# Altium PCB AdaptadorUSBSerialRS232.PcbDoc
Units mil, origin at the board's own origin, x right, y up, seen from the top; angles counter-clockwise.
Board outline 2378.52 x 1000.56 mil, 2 copper layers (Top Layer, Bottom Layer), stack 65.792 mil thick; 27 components, 35 nets, 155 pads, 6 vias.
Unrouted connection lines stored in the file: 28.
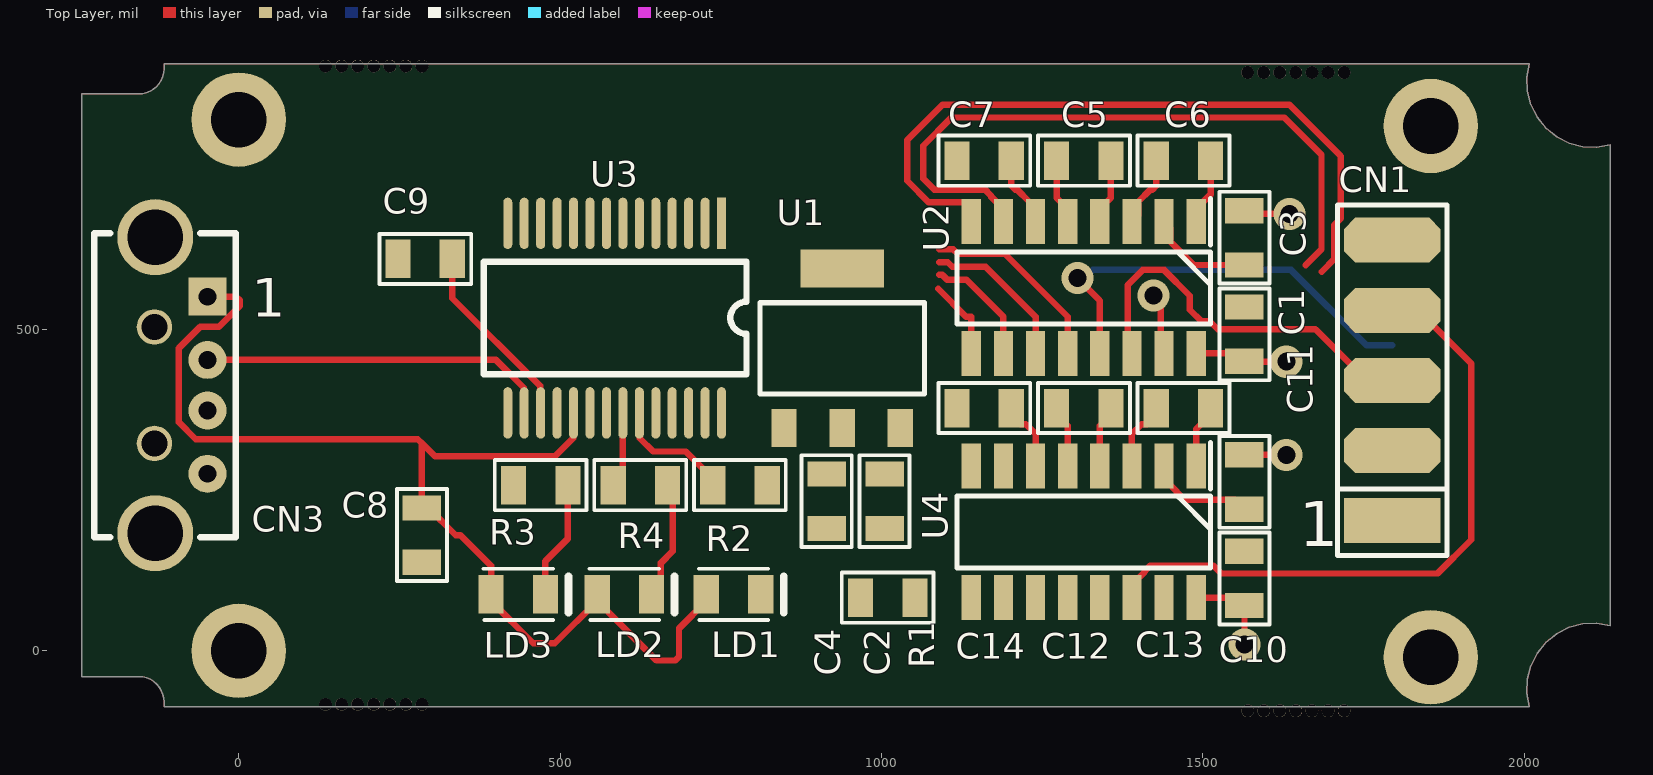
[diagram p0: Top Layer view]
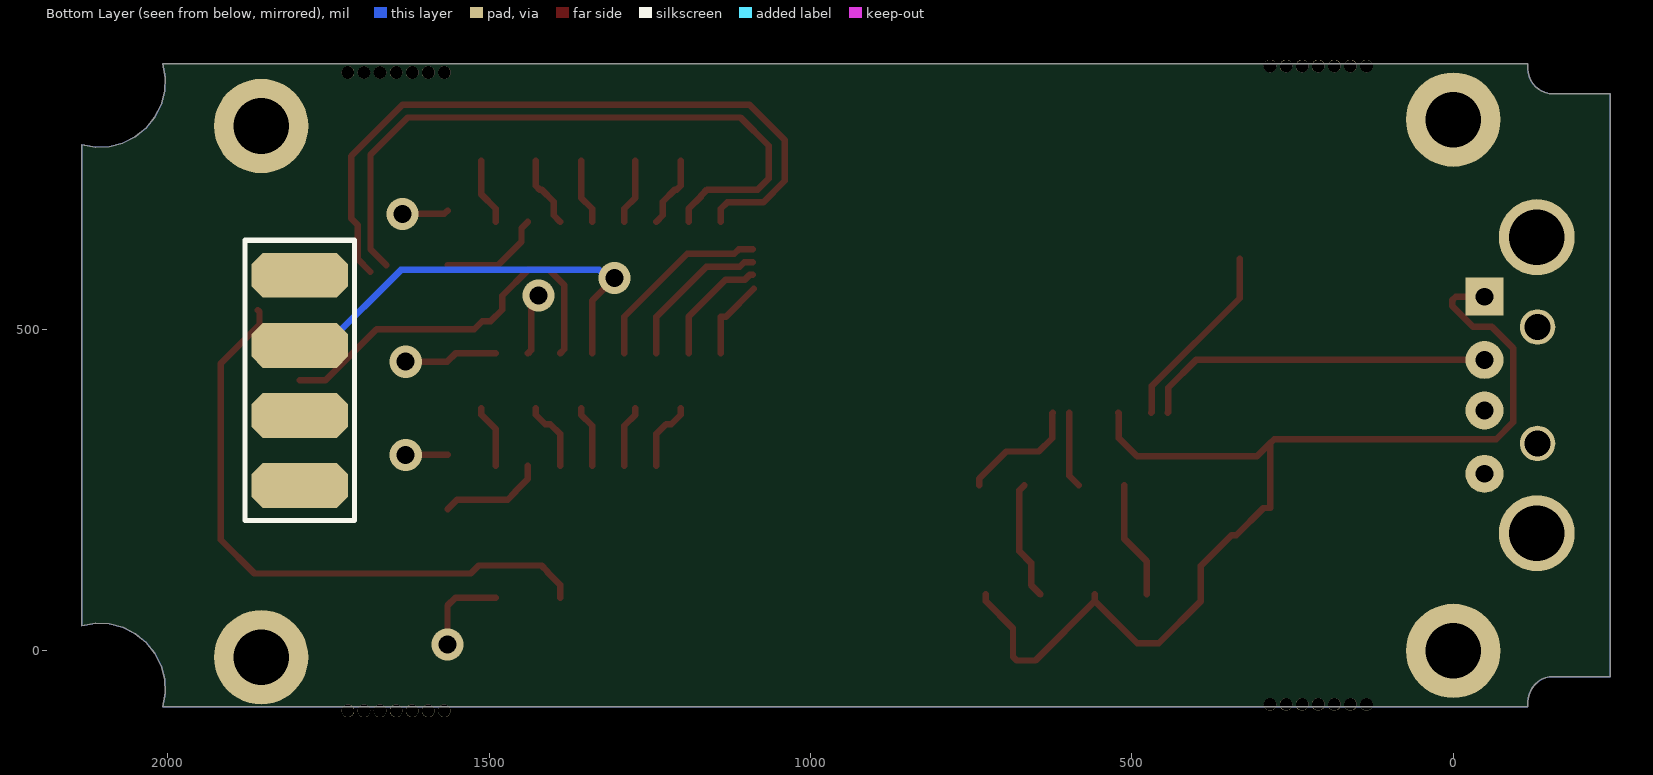
[diagram p1: Bottom Layer view, seen from below]
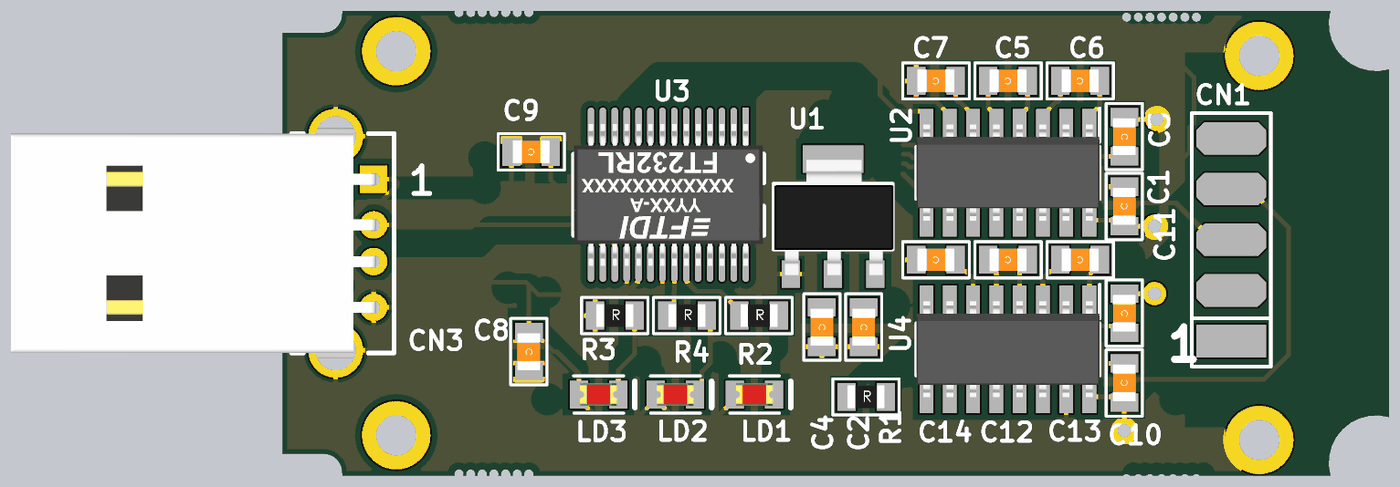
[diagram p2: 3D render of the assembled board from above, using the file's embedded part models]

## Layer stack, top to bottom
Top Solder: solder mask 0.4, Solder Resist, Dk 3.5
Top Layer: signal copper 1.4
Dielectric 1: dielectric 62.9921, FR-4, Dk 4.8
Bottom Layer: signal copper 1.4
Bottom Solder: solder mask 0.4, Solder Resist, Dk 3.5

## Board outline
-116.42,-86.9 -116.42,-79.31 -116.85,-73.5 -118.13,-67.83 -120.43,-62 -123.62,-56.61 -127.63,-51.79 -132.35,-47.67 -137.67,-44.35 -143.44,-41.92 -149.53,-40.43 -155.78,-39.94 -244.38,-39.94 -244.38,866.71 -155.78,866.71 -149.98,867.14 -144.32,868.41 -138.49,870.71 -133.09,873.9 -128.28,877.91 -124.16,882.64 -120.84,887.96 -118.41,893.73 -116.92,899.83 -116.42,906.08 -116.42,913.67 2008.09,913.67 2004.42,892.34 2005.33,870.73 2010.78,849.79 2020.52,830.47 2034.11,813.63 2050.94,800.04 2070.26,790.31 2091.2,784.86 2112.82,783.95 2134.14,787.61 2134.14,39.16 2112.82,42.82 2091.2,41.91 2070.26,36.47 2050.94,26.73 2034.11,13.14 2020.52,-3.7 2010.78,-23.02 2005.33,-43.96 2004.42,-65.57 2008.09,-86.9

## Design rules (kind name [scope] priority, off if disabled: settings)
BoardOutlineClearance [IsPolygon] p1: gap=10 ignorepadtopadclearanceinfootprint=FALSE except(0: Arc-SplitContinuation Track-SplitContinuation SMDPad-SplitContinuation THPad-SplitContinuation Via-SplitContinuation Fill-SplitContinuation Poly-SplitContinuation Region-SplitContinuation Text-SplitContinuation)
Clearance Clearance_Poly [InPolygon] p1: gap=15 ignorepadtopadclearanceinfootprint=FALSE except(0: Arc-Hole Track-Hole SMDPad-Hole THPad-Hole Via-Hole Fill-Hole Poly-Hole Region-Hole Text-Hole)
Clearance [All] p2: gap=10 ignorepadtopadclearanceinfootprint=FALSE except(0: Arc-Hole Track-Hole SMDPad-Hole THPad-Hole Via-Hole Fill-Hole Poly-Hole Region-Hole Text-Hole)
ComponentClearance [All] p1: gap=5 collisioncheckmode=3 verticalgap=0 showdistances=FALSE
DiffPairsRouting [All] p1: maxlimit=10 minlimit=10 mostfreqgap=10 toplayer_minwidth=10 toplayer_maxwidth=10 toplayer_prefwidth=10 bottomlayer_minwidth=10 bottomlayer_maxwidth=10 bottomlayer_prefwidth=10 maxuncoupledlength=500
HoleToHoleClearance [All] p1: gap=5 allowstackedmicrovias=TRUE
PolygonConnect PolygonConnect_Via [IsVia] p1: connectstyle=Direct reliefconductorwidth=10 reliefentries=4 polygonreliefangle="90 Angle" airgapwidth=10
PolygonConnect [All] p2: connectstyle=Relief reliefconductorwidth=10 reliefentries=4 polygonreliefangle="90 Angle" airgapwidth=10
RoomDefinition FABIO [False] p1: confinementstyle=ConfineIn formatcopy=TRUE lockcomponents=FALSE outline -239.88,-202.17 1080,-202.17 1080,1130 -239.88,1130
RoomDefinition MATHEUS [False] p2: confinementstyle=ConfineIn formatcopy=TRUE lockcomponents=FALSE outline 1079.92,-202.17 2399.8,-202.17 2399.8,1130 1079.92,1130
RoutingVias [All] p1: holewidth=28 width=50 viastyle="Through Hole" minholewidth=20 minwidth=40 maxholewidth=28 maxwidth=50
SilkToSilkClearance [All] p1 off: silktosilkclearance=10
SolderMaskExpansion [All] p1: expansion=4 istentingtop=FALSE
Width [All] p1: maxlimit=30 minlimit=10 preferedwidth=10 minimp=50.000000 maximp=50.000000 favimp=50.000000
26 further rules are at their usual default settings.

## Classes and differential pairs
differential pair D: +D_P -D_N

## Components (designator, comment, footprint, x,y, rotation, side; value= is the part's Value field where it differs from the comment)
C1 "100n" 0805C 1564.88,492.83 r90 top
C2 "100n" 0805C 1004.88,232.83 r270 top
C3 "100n" 0805C 1564.88,642.83 r270 top
C4 "10u" 0805C 914.88,232.83 r270 top
C5 "100n" 0805C 1314.88,762.83 r180 top
C6 "100n" 0805C 1469.88,762.83 r180 top
C7 "100n" 0805C 1159.88,762.83 r180 top
C8 "10u" 0805C 285,180 r270 top
C9 "100n" 0805C 290,610 r180 top
C10 "100n" 0805C 1564.88,112.83 r90 top
C11 "100n" 0805C 1564.88,262.83 r270 top
C12 "100n" 0805C 1314.88,377.83 r180 top
C13 "100n" 0805C 1469.88,377.83 r180 top
C14 "100n" 0805C 1159.88,377.83 r180 top
CN1 "DB9M" BARRA1X9 1794.88,420.94 r90 top
CN3 "USB" "USB-B 90" -90,413.39 r270 top
LD1 "RED" 0805L 769.88,87.83 r180 top
LD2 "RED" 0805L 599.88,87.83 r180 top
LD3 "RED" 0805L 434.88,87.83 r180 top
R1 "0" 0805R 1009.88,82.83 r0 top
R2 "680" 0805R 779.88,257.83 r0 top
R3 "680" 0805R 469.88,257.83 r0 top
R4 "680" 0805R 624.88,257.83 r0 top
U1 "LM1117" SOT223 848.33,346.83 r0 top
U2 "MAX3232" SO16 1489.88,667.83 r270 top
U3 "FT232RL" SSOP28-175-0.64 584.88,517.83 r270 top
U4 "MAX3232" SO16 1489.88,287.83 r270 top

## Footprints (in the part's own frame and the unit in brackets; to place one, negate y for a bottom-side part, rotate by r counter-clockwise, add the part's x,y. Pads: shape width x height; smd on the part's side, far side on the other; paste and mask are expansions set on the pad)
0805C [mil]
  rect 39.37x60 smd: 1(-42.3,0) 2(42.3,0)
  silkscreen extent -72,-39 71,39, body extent -40,-25 40,25, height 36
0805L [mil] "LED 0805"
  rect 39.37x60 smd: 1(-42.3,0) 2(42.3,0)
  silkscreen extent -78,-40 54,40, body extent -40,-25 40,25, height 43
0805R [mil] "Resistor"
  rect 39.37x60 smd: 1(-42.3,0) 2(42.3,0)
  silkscreen extent -72,-39 71,39, body extent -40,-25 40,24, height 20
BARRA1X9 [mil] "ESPERA DB9"
  rect 70x150 smd: 1(-218.11,0)
  oct 70x150 smd: 2(-109.05,0) 3(0,0) 4(109.06,0) 5(218.11,0)
  oct 70x150 smd far side: 6(-163.58,0) 7(-54.53,0) 8(54.53,0) 9(163.58,0)
  silkscreen extent -273,-85 273,85
SO16 [mil]
  rect 70x30 smd: 1(0,0) 2(0,-50) 3(0,-100) 4(0,-150) 5(0,-200) 6(0,-250) 7(0,-300) 8(0,-350) 9(205,-350) 10(205,-300) 11(205,-250) 12(205,-200) 13(205,-150) 14(205,-100) 15(205,-50) 16(205,0)
  silkscreen extent -36,-372 159,22, body extent -1,-372 206,22, height 55
SOT223 [mm]
  rect 1x1.5 smd: 1(0,0) 2(2.3,0) 3(4.6,0)
  rect 3.3x1.5 smd: 2(2.3,6.3)
  silkscreen extent -0.95,1.35 5.55,4.95, body extent -0.9,-0.05 5.6,6.25, height 1.68
SSOP28-175-0.64 [mil]
  rect 80x14 smd: 1(-147.5,166.34)
  oval 80x14 smd: 2(-147.5,140.75) 3(-147.5,115.16) 4(-147.5,89.57) 5(-147.5,63.98) 6(-147.5,38.39) 7(-147.5,12.8) 8(-147.5,-12.8) 9(-147.5,-38.39) 10(-147.5,-63.98) 11(-147.5,-89.57) 12(-147.5,-115.16) 13(-147.5,-140.75) 14(-147.5,-166.34) 15(147.5,-166.34) 16(147.5,-140.75) 17(147.5,-115.16) 18(147.5,-89.57) 19(147.5,-63.98) 20(147.5,-38.39) 21(147.5,-12.8) 22(147.5,12.8) 23(147.5,38.39) 24(147.5,63.98) 25(147.5,89.57) 26(147.5,115.16) 27(147.5,140.75) 28(147.5,166.34)
  silkscreen extent -88,-204 88,205, body extent -153,-203 153,203, height 85
"USB-B 90" [mm] "Conector USB fêmea 90°"
  rect 1.5x1.5 hole 0.7: 1(-3.5,1.05)
  round 1.5 hole 0.7: 2(-1,1.05) 3(1,1.05) 4(3.5,1.05)
  round 1.397 hole 1.016: PH0(-2.3,-1.05) PH1(2.3,-1.05)
  round 3 hole 2.2: PH2(-5.851,-1.018) PH3(5.851,-1.018)
  silkscreen extent -6,-3.43 6,2.16, body extent -6.3,-18.75 6.3,1.18, height 3.14

## Part data
C1 C2 C3 C5 C6 C7 C10 C11 C12 C13 C14: library part CAP, "CAPACITOR SMD 0805 100nF/50V X7R", Meu PN=10.10.104
C4 C8: library part CAP, "CAPACITOR SMD 0805 10UF/6,3V X7R", Meu PN=10.10.106
C9: library part CAP, "CAPACITOR SMD 0805 100NF/50V X7R", Meu PN=10.10.104
CN1: library part "Header 9", "Espera para DB9 M"
CN3: library part "Header 6", "CONECTOR USB", Meu PN=11.10.001
LD1 LD2 LD3: library part LED, "LED 0805 VERMELHO", Meu PN=10.11.001
  LD1: Funcao=TX
  LD2: Funcao=RX
  LD3: Funcao=PW
R1: library part RES, "RESISTOR SMD 0805 0 OHM (JUMPER)", Meu PN=10.12.000
R2 R3 R4: library part RES, "RESISTOR SMD 0805 680 OHM", Meu PN=10.12.681
U1: "REGULADOR LINEAR SMD LM1117MPX-3.3", Meu PN=10.13.117
U2 U4: library part MAX232, "CI SMD MAX3232 SO16 NARROW", Meu PN=10.13.323
U3: library part CMP-0078-00027-1, "USB UART FT232RL, SSOP-28, Tray", Supplier Part Number 1=768-1007-6-ND, Supplier 1=Digikey

## Free pads (board coordinates)
  round 146.8 hole 86.61: 1(0,0) 1(0,826.77) 1(1855,-10) 1(1855,816.77)
  round 19.68 hole 19.68 unplated paste+0 mask+4: 25(135,-83.23) 25(135,910) 25(160,-83.23) 25(160,910) 25(185,-83.23) 25(185,910) 25(210,-83.23) 25(210,910) 25(235,-83.23) 25(235,910) 25(260,-83.23) 25(260,910) 25(285,-83.23) 25(285,910) 25(1570,-93.23) 25(1570,900) 25(1595,-93.23) 25(1595,900) 25(1620,-93.23) 25(1620,900) 25(1645,-93.23) 25(1645,900) 25(1670,-93.23) 25(1670,900) 25(1695,-93.23) 25(1695,900) 25(1720,-93.23) 25(1720,900)

## Via types
v1: diameter 50, hole 28, Top Layer to Bottom Layer, 6 vias

## Nets (pads, with @x,y where several pads share a name; then routed paths per layer and width w, separated by ;. In a path a pad name is that pad's centre, name@x,y a point inside that pad or via, vN(x,y) a via of type N, cw(c..) or ccw(c..) an arc to the next point about the centre after c; other vN are vias at no path point)
232_CTS: CN1.8 U2.13 | length 675.4
  Top Layer w10: v1(1305,580) 1339.88,545.12 U2.13
  Bottom Layer w10: v1(1305,580) 1315.82,580 1328.66,592.83 1637.52,592.83 1754.88,475.47 CN1.8
232_DSR: CN1.6 U4.8
232_DTR: CN1.4 U4.14 | length 970.9
  Top Layer w10: U4.14 1389.88,102.83 1409.88,122.83 1409.88,124.05 1418.67,132.83 1516.29,132.83 1528.67,120.45 1865.45,120.45 1917.73,172.73 1917.73,447.16 1857.6,507.29 1857.6,527.6 CN1.4@1860,530
232_RTS: CN1.7 U2.7 | length 1060.4
  Top Layer w10: U2.7 1189.88,687.83 1169.88,707.83 1169.88,709.05 1161.09,717.83 1082.17,717.83 1065,735 1065,785.86 1109.14,830 1626.72,830 1684.88,771.83 1684.88,624.88 1660,600
232_RX: CN1.2 U2.8 | length 1124.7
  Top Layer w10: U2.8 1139.88,687.83 1129.88,697.83 1073.88,697.83 1040,731.72 1040,795 1095,850 1635,850 1715,770 1715,672.89 1704.88,662.77 1704.88,609.88 1685,590
232_TX: CN1.3 U2.14 | length 614.6
  Top Layer w10: U2.14 1383.31,469.4 1383.31,569.4 1406.74,592.83 1439.88,592.83 1480,552.72 1480,530.86 1498.02,512.83 1511.09,512.83 1523.48,500.45 1675.37,500.45 1754.88,420.94 CN1.3
+3.3: C1.1 C3.1 C4.1 C10.1 C11.1 U1.2 U2.16 U3.4 U4.16 | length 423.5
  Top Layer w10: U4.16 1552.58,82.83 C10.1 1565,70.41 v1(1565,10) ; U2.16 1552.58,462.83 C1.1 1565.41,450 v1(1630,450) ; C11.1 1565.02,305 v1(1630,305) ; C3.1 1570.02,680 v1(1635,680)
CTS: U2.12 U3.11 | length 300.5
  Top Layer w10: 1090,625 1111.5,625 1118.67,617.83 1192.05,617.83 1289.88,520 U2.12
D_N: CN3.2 U3.16 | length 549.5
  Top Layer w10: CN3.2 400.24,452.75 443.37,409.62 443.37,371.1 U3.16
D_P: CN3.3 U3.15
DSR: R1.2 U3.9 U4.9
DTR: R1.1 U3.2 U4.11
GND: C1.2 C2.2 C4.2 C7.2 C8.2 C9.2 C10.2 C14.2 CN1.5 CN3.4 CN3.PH2 CN3.PH3 R3.1 U1.1 U2.15 U3.7 U3.18 U3.21 U3.25 U3.26 U4.15 | length 96.9
  Top Layer w10: v1(1423.31,552.83) 1435,541.15 1435,467.72 U2.15
NetC3_2: C3.2 U2.2 | length 165.3
  Top Layer w10: U2.2 1449.88,657.83 1449.88,636.62 1485.97,600.53 C3.2
NetC5_1: C5.1 U2.4 | length 102.2
  Top Layer w10: U2.4 1339.88,687.83 1357.19,705.14 C5.1
NetC5_2: C5.2 U2.5 | length 102.2
  Top Layer w10: C5.2 1272.58,705.14 1289.88,687.83 U2.5
NetC6_1: C6.1 U2.1 | length 104.2
  Top Layer w10: U2.1 1489.88,687.83 1512.19,710.14 C6.1
NetC6_2: C6.2 U2.3 | length 112.4
  Top Layer w10: U2.3 1399.88,677.83 1399.88,699.05 1418.67,717.83 1421.72,717.83 1427.58,723.69 C6.2
NetC7_1: C7.1 U2.6 | length 112.4
  Top Layer w10: C7.1 1202.19,723.69 1208.04,717.83 1211.1,717.83 1229.88,699.05 1229.88,677.83 U2.6
NetC9_1: C9.1 U3.17 | length 296.6
  Top Layer w10: C9.1 332.3,548.97 468.96,412.32 468.96,371.1 U3.17
NetC11_2: C11.2 U4.2 | length 165.3
  Top Layer w10: U4.2 1439.88,267.83 1459.88,247.83 1459.88,246.62 1471.29,235.22 1550.2,235.22 C11.2
NetC12_1: C12.1 U4.4 | length 97.2
  Top Layer w10: U4.4 1339.88,350.22 1357.19,367.52 C12.1
NetC12_2: C12.2 U4.5 | length 97.2
  Top Layer w10: C12.2 1272.58,367.52 1289.88,350.22 U4.5
NetC13_1: C13.1 U4.1 | length 99.2
  Top Layer w10: U4.1 1489.88,345.22 1512.19,367.52 C13.1
NetC13_2: C13.2 U4.3 | length 110.3
  Top Layer w10: U4.3 1389.88,337.83 1404.88,352.83 1412.89,352.83 1427.58,367.52 C13.2
NetC14_1: C14.1 U4.6 | length 110.3
  Top Layer w10: C14.1 1202.19,367.52 1216.87,352.83 1224.88,352.83 1239.88,337.83 U4.6
NetLD1_1: LD1.1 R2.2
NetLD2_1: LD2.1 R4.2 | length 186.8
  Top Layer w10: LD2.1 656.87,102.52 656.87,136.87 675,155 675,250.02 R4.2
NetLD3_1: LD3.1 R3.2 | length 184.5
  Top Layer w10: LD3.1 477.19,139.76 512.19,174.76 R3.2
NetR2_1: R2.1 U3.23 | length 189.5
  Top Layer w10: U3.23 624.03,369.57 624.03,331.05 644.87,310.21 695.52,310.21 737.58,268.15 R2.1
NetR4_1: R4.1 U3.22 | length 118.8
  Top Layer w10: R4.1 597.26,272.52 597.26,308.95 597.68,309.37 U3.22
RTS: U2.10 U3.3 | length 184
  Top Layer w10: 1090,585 1094.93,585 1102.1,577.83 1132.05,577.83 1189.88,520 U2.10
RX: U2.9 U3.5 | length 126.7
  Top Layer w10: 1088.33,563.33 1131.65,520 1139.88,520 U2.9
TX: U2.11 U3.1 | length 242.3
  Top Layer w10: 1090,605 1103.22,605 1110.38,597.83 1162.05,597.83 1239.88,520 U2.11
VCC: C2.1 C8.1 CN3.1 LD1.2 LD2.2 LD3.2 U1.3 U3.6 U3.10 U3.19 U3.20 | length 1798.5
  Top Layer w10: CN3.1 -4.13,551.18 1.72,545.32 1.72,537.04 -31.2,504.12 -60.27,504.12 -93.19,471.2 -93.19,355.57 -67.11,329.49 278.61,329.49 285,323.1 ; U3.19 520.14,369.57 520.14,331.05 491.93,302.83 305.26,302.83 285,323.1 ; LD2.2 LD2.2@557.58,77.52 ; LD1.2 727.58,77.52 685,34.94 685,-9.14 679.14,-15 650.1,-15 LD2.2@557.58,77.52 ; 285,323.1 C8.1 295.31,222.3 337.62,180 345,180 392.58,132.42 LD3.2 392.58,77.52 458.41,11.69 491.75,11.69 LD2.2@557.58,77.52
pads on no net: CN1.1 CN1.9 CN3.PH0 CN3.PH1 U3.8 U3.12 U3.13 U3.14 U3.24 U3.27 U3.28 U4.7 U4.10 U4.12 U4.13

## Polygon pours and split planes (outlines as drawn)
GND on Bottom Layer "Top Bottom" (solid, remove dead copper, shelved, pour order 5): -116.42,-86.9 -116.42,-79.31 -116.85,-73.5 -118.13,-67.83 -120.43,-62 -123.62,-56.61 -127.63,-51.79 -132.35,-47.67 -137.67,-44.35 -143.44,-41.92 -149.53,-40.43 -155.78,-39.94 -244.38,-39.94 -244.38,866.71 -155.78,866.71 -149.98,867.14 -144.32,868.41 -138.49,870.71 -133.09,873.9 -128.28,877.91 -124.16,882.64 -120.84,887.96 -118.41,893.73 -116.92,899.83 -116.42,906.08 -116.42,913.67 2008.09,913.67 2004.42,892.34 2005.33,870.73 2010.78,849.79 2020.52,830.47 2034.11,813.63 2050.94,800.04 2070.26,790.31 2091.2,784.86 2112.82,783.95 2134.14,787.61 2134.14,39.16 2112.82,42.82 2091.2,41.91 2070.26,36.47 2050.94,26.73 2034.11,13.14 2020.52,-3.7 2010.78,-23.02 2005.33,-43.96 2004.42,-65.57 2008.09,-86.9
GND on Top Layer "Top Layer" (solid, remove dead copper, shelved, pour order 4): -116.42,-86.9 -116.42,-79.31 -116.85,-73.5 -118.13,-67.83 -120.43,-62 -123.62,-56.61 -127.63,-51.79 -132.35,-47.67 -137.67,-44.35 -143.44,-41.92 -149.53,-40.43 -155.78,-39.94 -244.38,-39.94 -244.38,866.71 -155.78,866.71 -149.98,867.14 -144.32,868.41 -138.49,870.71 -133.09,873.9 -128.28,877.91 -124.16,882.64 -120.84,887.96 -118.41,893.73 -116.92,899.83 -116.42,906.08 -116.42,913.67 2008.09,913.67 2004.42,892.34 2005.33,870.73 2010.78,849.79 2020.52,830.47 2034.11,813.63 2050.94,800.04 2070.26,790.31 2091.2,784.86 2112.82,783.95 2134.14,787.61 2134.14,39.16 2112.82,42.82 2091.2,41.91 2070.26,36.47 2050.94,26.73 2034.11,13.14 2020.52,-3.7 2010.78,-23.02 2005.33,-43.96 2004.42,-65.57 2008.09,-86.9

## Other copper
Top Layer:
  pour cut-out: 1874.8,814.06 1679.8,814.06 1679.8,7.83 1874.8,7.83
Bottom Layer:
  pour cut-out: 1874.8,814.06 1679.8,814.06 1679.8,7.83 1874.8,7.83

## Text inside footprints (layer, text, board x,y; h text height)
CN1: Top Overlay "1" at 1649.88,162.83 h70
CN3: Top Overlay "1" at 20,520 h60